# Altium PCB KMP-Watermeter-PCB.PcbDoc
Units mil, origin at the board's own origin, x right, y up, seen from the top; angles counter-clockwise.
Board outline 740 x 1530 mil, 2 copper layers (Top Layer, Bottom Layer), stack 65.8 mil thick; 17 components, 27 nets, 57 pads, 5 vias.
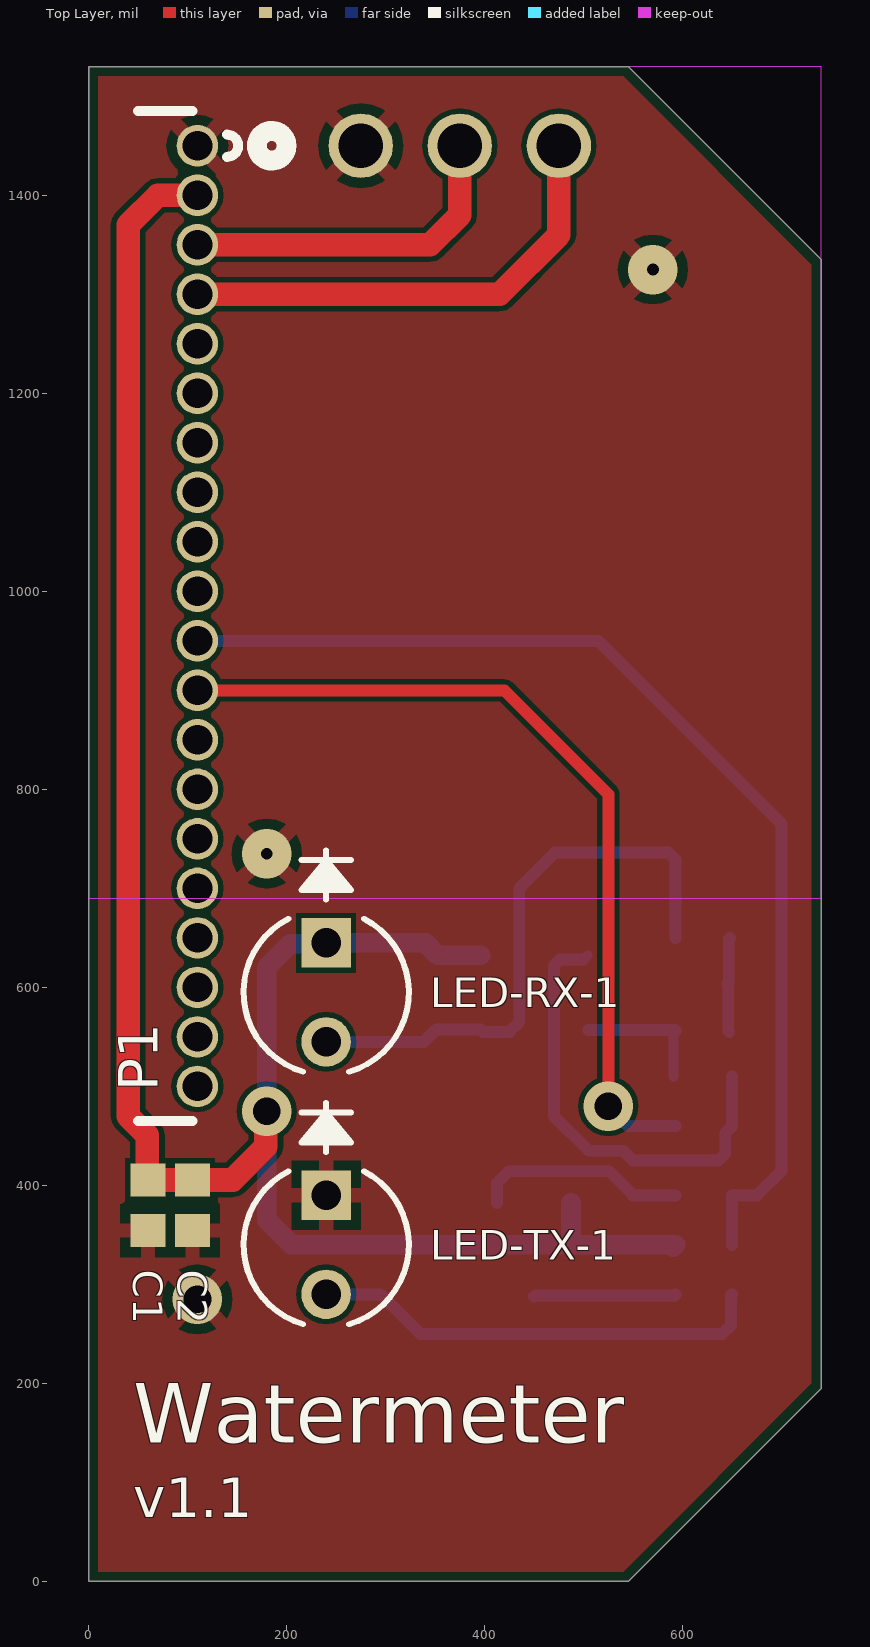
[diagram p0: Top Layer view]
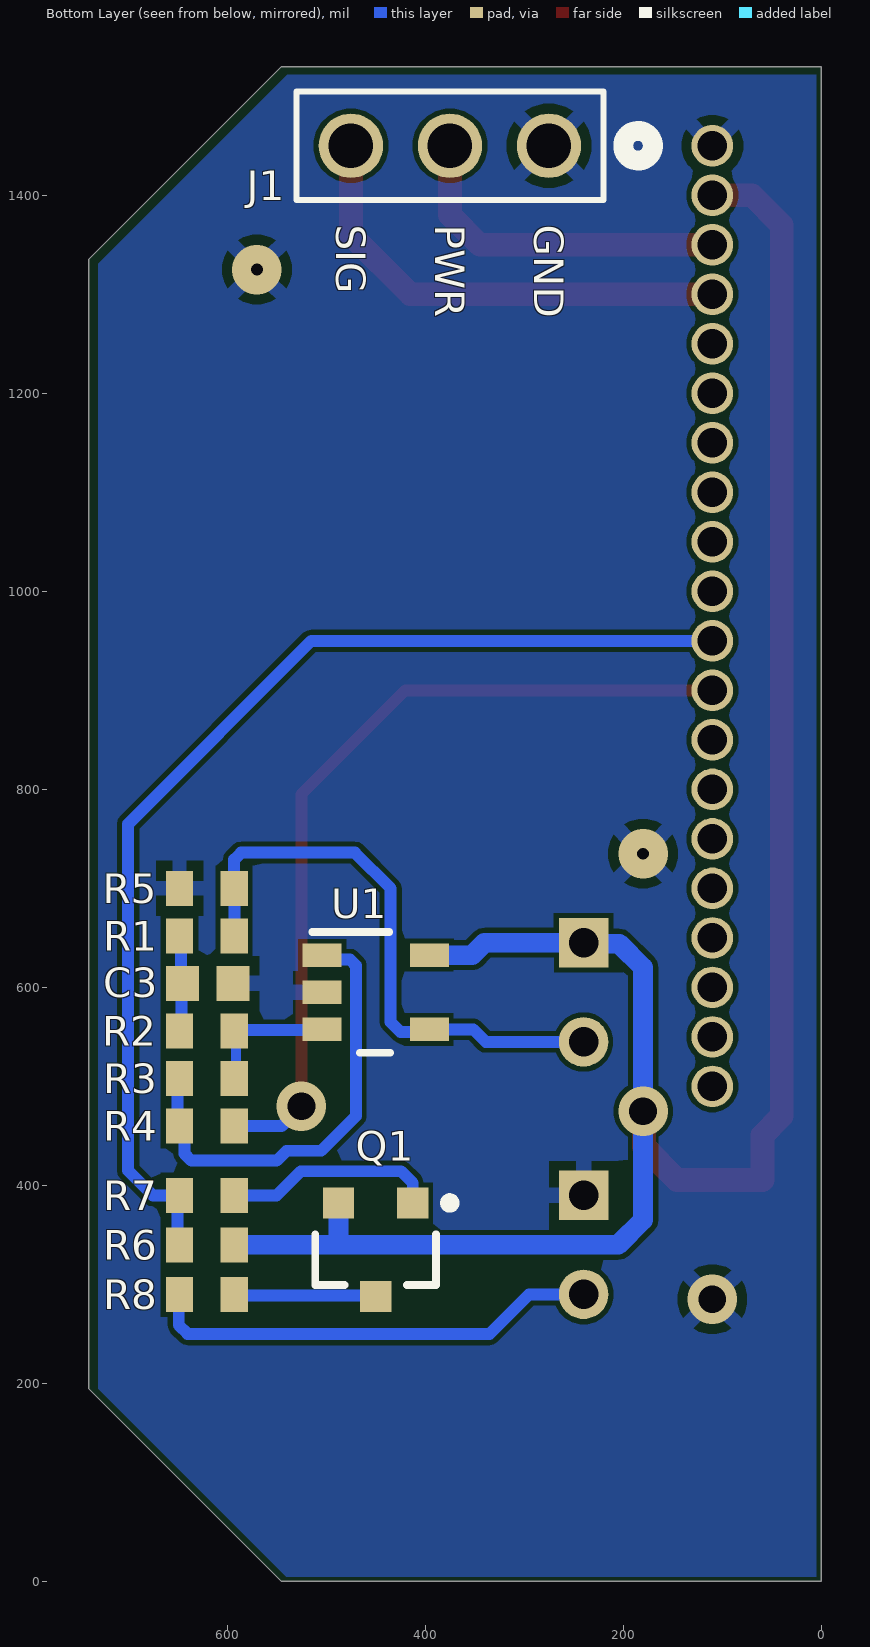
[diagram p1: Bottom Layer view, seen from below]
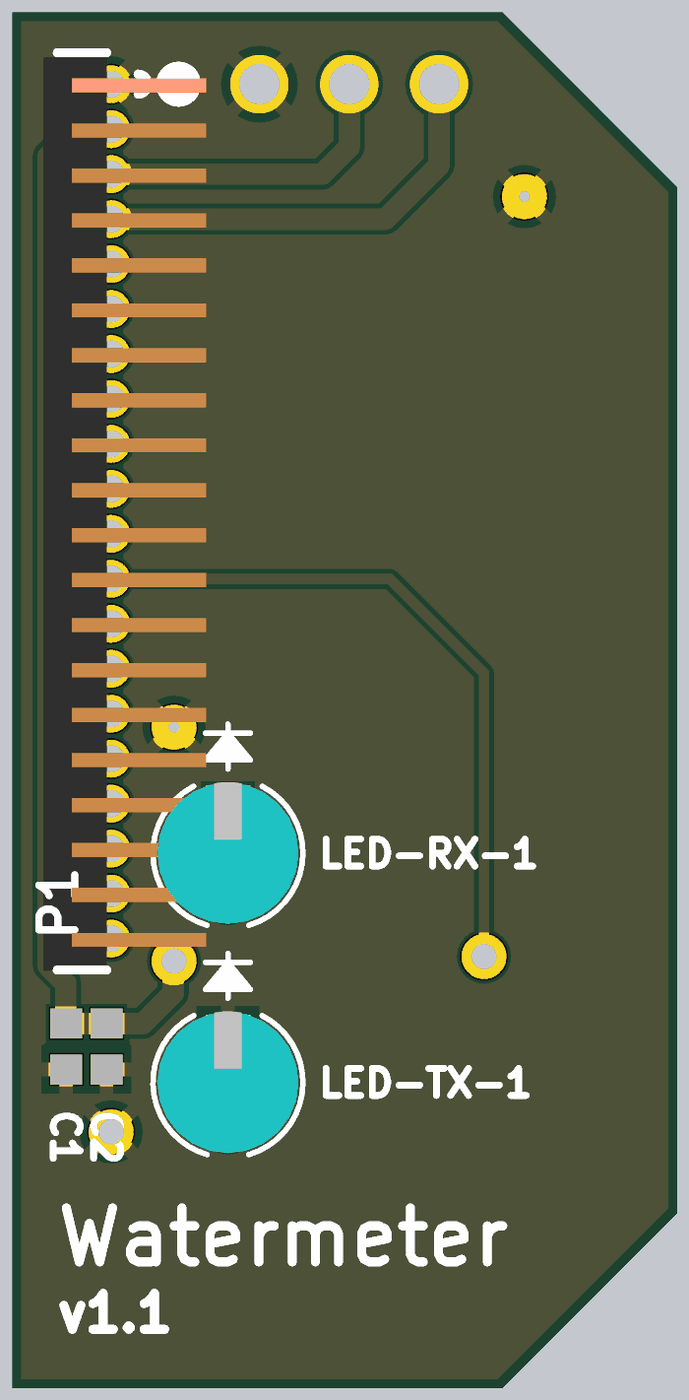
[diagram p2: 3D render of the assembled board from above, using the file's embedded part models]

## Layer stack, top to bottom
Top Solder: solder mask 0.4, Solder Resist, Dk 3.5
Top Layer: signal copper 1.4
Dielectric 1: dielectric 63, FR-4, Dk 4.8
Bottom Layer: signal copper 1.4
Bottom Solder: solder mask 0.4, Solder Resist, Dk 3.5

## Board outline
0,0 545,0 740,195 740,1335 545,1530 0,1530

## Design rules (kind name [scope] priority, off if disabled: settings)
Clearance [All] p1: gap=5 ignorepadtopadclearanceinfootprint=FALSE
ComponentClearance [All] p1: gap=5 collisioncheckmode=3 verticalgap=5 showdistances=TRUE
DiffPairsRouting [All] p1: maxlimit=10 minlimit=5 mostfreqgap=5 toplayer_minwidth=5 toplayer_maxwidth=1000 toplayer_prefwidth=5 bottomlayer_minwidth=5 bottomlayer_maxwidth=1000 bottomlayer_prefwidth=5 maxuncoupledlength=500
Height [All] p1: minheight=0 maxheight=71497.94 prefheight=500
HoleSize [All] p1: absolutevalues=TRUE maxlimit=248.03 minlimit=11.81 maxpercent=80.000 minpercent=20.000
HoleToHoleClearance ViaHoleToHoleClearance [IsVia vs IsVia] p1: gap=8 allowstackedmicrovias=FALSE
HoleToHoleClearance [All] p2: gap=10 allowstackedmicrovias=TRUE
MinimumAnnularRing [All] p1: minimumring=3
MinimumSolderMaskSliver [All] p1: minsoldermaskwidth=0
PlaneClearance [All] p1: clearance=5
PlaneConnect PlaneConnectPowerPads [InPadClass('PowerPads')] p1: planeconnectstyle=Direct reliefexpansion=20 reliefentries=4 reliefconductorwidth=10 reliefairgap=10
PlaneConnect [All] p2: planeconnectstyle=Relief reliefexpansion=20 reliefentries=4 reliefconductorwidth=10 reliefairgap=10
PolygonConnect PolygonConnectPowerPads [All vs (InPadClass('PowerPads'))] p1: connectstyle=Direct reliefconductorwidth=10 reliefentries=4 polygonreliefangle="90 Angle" airgapwidth=10
PolygonConnect [All] p2: connectstyle=Relief reliefconductorwidth=15 reliefentries=4 polygonreliefangle="45 Angle" conductorbypadedge=TRUE mindistance=15 enablemindistance=FALSE airgapwidth=10
RoomDefinition Transmitter [InComponentClass('Transmitter')] p1: confinementstyle=ConfineIn formatcopy=TRUE lockcomponents=FALSE outline -970,-900 -665,-900 -665,-660 -970,-660
RoomDefinition Receiver [InComponentClass('Receiver')] p2: confinementstyle=ConfineIn formatcopy=TRUE lockcomponents=FALSE outline 0,-55 -260,-55 -260,-280 0,-280
RoomDefinition KMP-Watermeter-Schematic [InComponentClass('KMP-Watermeter-Schematic')] p3: confinementstyle=ConfineIn formatcopy=TRUE lockcomponents=FALSE outline -325,-345 -595,-345 -595,-555 -325,-555
RoutingVias [All] p1: holewidth=11.81 width=23.62 viastyle="Through Hole" minholewidth=6 minwidth=12 maxholewidth=248.03 maxwidth=248.03
SilkToSilkClearance [All] p1: silktosilkclearance=0
SilkToSolderMaskClearance [IsPad] p1: minsilkscreentomaskgap=5.91 clearancetoexposedcopper=TRUE
SolderMaskExpansion [All] p1: expansion=2 istentingtop=FALSE
SupplyNets "Schematic Supply Nets_2" [InNet('VDD2')] p1: voltage=0.000
SupplyNets "Schematic Supply Nets_1" [InNet('+3V3')] p2: voltage=0.000
SupplyNets "Schematic Supply Nets" [InNet('GND')] p3: voltage=0.000
UnpouredPolygon BoardOutlineClearance [All] p2:
Width [All] p1: maxlimit=1000 minlimit=10 preferedwidth=12
Width Power [InNet('+3V3') or InNet('+12V')Or InNet('+3V3_ISO') Or InNet('GND') Or InNet('GND_ISO')] p2: maxlimit=1000 minlimit=20 preferedwidth=40 minimp=50.000000 maximp=50.000000 favimp=50.000000
20 further rules are at their usual default settings.

## Classes and differential pairs
component class Transmitter: LED-TX-1 Q1 R6 R7 R8
component class Receiver: C3 LED-RX-1 R1 R2 R3 R4 R5 U1
component class KMP-Watermeter-Schematic: C1 C2 J1 P1

## Components (designator, comment, footprint, x,y, rotation, side; value= is the part's Value field where it differs from the comment)
C1 "10n" CAPC1608X90X35LL15T15 60,380 r90 top
C2 "1u" CAPC1608X90X35LL15T15 105,380 r90 top
C3 "10n" CAPC1608X90X35LL15T15 619.53,604 r0 bottom locked
J1 "Pinheader" CONN03_6130_7P62X2P54_WRE 275,1450 r0 bottom
LED-RX-1 "TSAL4400" LED_RADIAL_TSAL4400 240,645 r270 top locked
LED-TX-1 "HIR204C" LED_RADIAL_HIR204C 240,390 r270 top locked
P1 "SMS-120-01-T-S" SMS-S-120 110,1450 r270 top locked
Q1 "AO3401A" AO-SOT-23-3L_V 450,335 r270 bottom
R1 "470K" RESC1608X55X25NL10T15 620.51,652 r0 bottom
R2 "470K" RESC1608X55X25NL10T15 620.51,556 r180 bottom
R3 "10M" RESC1608X55X25NL10T15 620.51,508 r0 bottom
R4 "549" RESC1608X55X25NL10T15 620.51,460 r180 bottom
R5 "4.7M" RESC1608X55X25NL10T15 620.51,700 r0 bottom
R6 "1M" RESC1608X55X25NL10T15 620.51,340 r180 bottom
R7 "549" RESC1608X55X25NL10T15 620.51,390 r180 bottom
R8 "200" RESC1608X55X25NL10T15 620.51,290 r180 bottom
U1 "TLV7031DBVR" DBV0005A_N 450,595 r180 bottom

## Footprints (in the part's own frame and the unit in brackets; to place one, negate y for a bottom-side part, rotate by r counter-clockwise, add the part's x,y. Pads: shape width x height; smd on the part's side, far side on the other; paste and mask are expansions set on the pad)
AO-SOT-23-3L_V [mm] "SOT23, 3-Leads, Body 3.1x1.8mm, Pitch 0.95mm"
  rect 0.8x0.8 smd: 1(-1.2,0.95) 2(-1.2,-0.95) 3(1.2,0)
  silkscreen extent -1.32,-1.55 0.9,2.02, body extent -1.5,-1.55 1.5,1.55, height 1.25
CAPC1608X90X35LL15T15 [mm] "Chip Capacitor, 2-Leads, Body 1.60x0.81mm, IPC High Density"
  rect 0.85x0.9 smd: 1(-0.65,0) 2(0.65,0)
  body extent -0.88,-0.48 0.87,0.48, height 0.9
CONN03_6130_7P62X2P54_WRE [mil]
  round 65 hole 45 paste-99999 mask+0: 1(0,0) 2(100,0) 3(200,0)
  silkscreen extent -105,-55 255,55
DBV0005A_N [mm]
  rect 1x0.6 smd paste+0 mask+0.051: 1(-1.375,0.95) 2(-1.375,0) 3(-1.375,-0.95) 4(1.375,-0.95) 5(1.375,0.95)
  silkscreen extent -1.63,-1.55 0.37,1.55
LED_RADIAL_HIR204C [mil]
  rect 50x50 / inner round 60 / far side rect 50x50 hole 30 paste-99999 mask+0: 1(0,0)
  round 50 / inner round 60 / far side round 50 hole 30 paste-99999 mask+0: 2(100,0)
  silkscreen extent -93,-83 130,83, body extent -29,-78 128,78, height 207
LED_RADIAL_TSAL4400 [mil]
  rect 50x50 / inner round 60 / far side rect 50x50 hole 30 paste-99999 mask+0: 1(0,0)
  round 50 / inner round 60 / far side round 50 hole 30 paste-99999 mask+0: 2(100,0)
  silkscreen extent -93,-83 130,83, body extent -29,-78 128,78, height 207
RESC1608X55X25NL10T15 [mm] "Chip Resistor, 2-Leads, Body 1.60x0.80mm, IPC Medium Density"
  rect 0.7x0.9 smd: 1(-0.7,0) 2(0.7,0)
  body extent -0.85,-0.45 0.85,0.45, height 0.55
SMS-S-120 [mil]
  round 42 / inner round 60 / far side round 42 hole 30 paste-99999: 1(0,0) 2(50,0) 3(100,0) 4(150,0) 5(200,0) 6(250,0) 7(300,0) 8(350,0) 9(400,0) 10(450,0) 11(500,0) 12(550,0) 13(600,0) 14(650,0) 15(700,0) 16(750,0) 17(800,0) 18(850,0) 19(900,0) 20(950,0)
  silkscreen extent -35,-60 985,41, body extent -30,-182 986,2, height 71

## Part data
C1 C2 C3: library part CMP-2006-02133-1, Manufacturer="AVX Interconnect / Elco", Part Number=0603ZC101KAT2A
J1: library part 61300311121, "WR-PHD 2.54 mm Pin Header", Manufacturer_Name="Wurth Electronics", Copyright="Copyright (C) 2026 Ultra Librarian. All rights reserved.", Manufacturer_Part_Number=61300311121, RefDes=RefDes, Type=Type
LED-RX-1: "Description", Manufacturer_Name="Vishay Semiconductors", Copyright="Copyright (C) 2025 Ultra Librarian. All rights reserved.", Manufacturer_Part_Number=TSAL4400, Type="LED Indication"
LED-TX-1: "Description", Manufacturer_Name=Everlight, Copyright="Copyright (C) 2025 Ultra Librarian. All rights reserved.", Manufacturer_Part_Number=HIR204C, Type="LED Indication"
P1: "No Description Available", Mfr_Name="Samtec Inc", RefDes=RefDes, Type=Type
Q1: library part CMP-2000-05778-1, "P-Channel MOSFET, 30 V, 4 A, -55 to 150 degC, 3-Pin SOT-23-3L, RoHS, Tape and Reel", Continuous Drain Current=4A, Drain-Source On-Volt=30V, Frequency (Max)=NotRequiredMHz, Gate-Source Voltage (Max)=?12V, Manufacturer="Alpha and Omega", Operating Temp Range=-55Cto150C, Operating Temperature Classification=Military, Output Power (Max)=NotRequiredW, Package Description="3-Pin Small Outline Transistor, Body 2.95 x 1.6 mm, Pitch 0.95 mm", Package Reference=SOT-23-3L, Package Type=SOT-23, Power Dissipation=1.4W, Power Gain=NotRequireddB, Channel Mode=Enhancement, Datasheet URL=http://www.aosmd.com/res/data_sheets/AO3401A.pdf, Datasheet Version="Rev. 3, 03/2011", Drain Current (Max)=4A, Drain Efficiency=NotRequired%, Drain-Source On-Res=0.044ohm, Manufacturer URL=http://www.aosmd.com/, Mounting=SurfaceMount, Mounting Technology=SurfaceMount, Noise Figure=NotRequireddB, Number of  Elements=1, Package URL=http://www.aosmd.com/res/packaging_information/SOT-23-3L.pdf, Pin Count=3, Polarity=P, Rad Hardened=No, Type=PowerMOSFET
R1 R2 R3 R4 R5 R6 R7 R8: library part CMP-2000-04082-1, Manufacturer=Yageo, Part Number=RC0603FR-07549RL
U1: "Nanopower, small size comparator with push-pull output 5-SOT-23 -40 to 125", Manufacturer_Name="Texas Instruments", Copyright="Copyright (C) 2026 Ultra Librarian. All rights reserved.", Manufacturer_Part_Number=TLV7031DBVR, RefDes=RefDes, Type=TYPE

## Via types
v1: diameter 50, hole 28, Top Layer to Bottom Layer, 3 vias
v2: diameter 50, hole 12, Top Layer to Bottom Layer, 2 vias

## Nets (pads, with @x,y where several pads share a name; then routed paths per layer and width w, separated by ;. In a path a pad name is that pad's centre, name@x,y a point inside that pad or via, vN(x,y) a via of type N, cw(c..) or ccw(c..) an arc to the next point about the centre after c; other vN are vias at no path point)
+3V3: C1.2 C2.2 LED-RX-1.1 P1.2 Q1.2 R6.2 U1.5 | length 2181.2
  Top Layer w12: v1@179.09,474.09 v1(180,475)
  Top Layer w24: P1.2 70,1400 40,1370 40,470 59.41,450.59 59.41,405.59 C1.2 C2.2 145.59,405.59 179.09,439.09 v1@179.09,474.09
  Bottom Layer w12: LED-RX-1.1@239.03,644.03 LED-RX-1.1 ; 485,340 487.4,342.4
  Bottom Layer w20: LED-RX-1.1@239.03,644.03 204.03,644.03 180,620 v1(180,475) 180,365 205,340 485,340 R6.2 R6.2@590.45,337.5 ; LED-RX-1.1 340,645 352.6,632.4 U1.5 ; 487.4,342.4 Q1.2
GND: C1.1 C2.1 C3.1 J1.1 LED-TX-1.1 P1.1 R5.2 U1.2
  other v1: 110,285
  other v2: 180,735 570,1325
NetC3_2: C3.2 R1.2 R2.1 | length 97
  Bottom Layer w12: R2.1@647.09,555 646.1,555.98 646.1,603.03 C3.2 646.58,605.47 646.58,648.54 R1.2@648.03,650
NetJ1_3: J1.3 P1.4 | length 479.9
  Top Layer w24: P1.4 415,1300 475,1360 J1.3
NetLED-RX-1_2: LED-RX-1.2 R1.1 R5.1 U1.4 | length 595.1
  Bottom Layer w12: LED-RX-1.2 338.83,545 351.42,557.6 U1.4 398.47,555 425,555 435,565 435,700 471.04,736.04 585.92,736.04 592.95,729.01 R5.1 ; R5.1@592.68,699.76 592.68,650.24 R1.1@592.91,650
NetLED-TX-1_2: LED-TX-1.2 R8.1 | length 460.7
  Bottom Layer w12: LED-TX-1.2 295,290 335,250 640,250 648.84,258.84 648.84,288.84 R8.1@650,290
NetP1_5: P1.5
NetP1_6: P1.6
NetP1_7: P1.7
NetP1_8: P1.8
NetP1_9: P1.9
NetP1_10: P1.10
NetP1_11: P1.11 R6.1 R7.1 | length 1127
  Bottom Layer w12: P1.11 515,950 700,765 700,415 675,390 650,390 R6.1@650,340
NetP1_12: P1.12 R4.2 | length 849.7
  Top Layer w12: P1.12 420,900 525,795 v1(525,480)
  Bottom Layer w12: v1(525,480) 545,460 R4.2@592.91,460
NetP1_13: P1.13
NetP1_14: P1.14
NetP1_15: P1.15
NetP1_16: P1.16
NetP1_17: P1.17
NetP1_18: P1.18
NetP1_19: P1.19
NetP1_20: P1.20
NetQ1_1: Q1.1 R7.2 | length 215.6
  Bottom Layer w12: Q1.1 412.6,402.6 424.28,414.28 525.72,414.28 550,390 R7.2
NetQ1_3: Q1.3 R8.2 | length 143.9
  Bottom Layer w12: Q1.3 451.12,288.88 591.83,288.88 R8.2
NetR2_2: R2.2 R3.1 U1.3 | length 132.4
  Bottom Layer w10: R3.1@590.94,510 R2.2@590.94,554.06
  Bottom Layer w12: U1.3@504.93,556.8 592.15,556.8 R2.2
NetR3_2: R3.2 R4.1 U1.1 | length 466
  Bottom Layer w10: U1.1@499.7,627.97 U1.1
  Bottom Layer w12: U1.1@499.7,627.97 475.86,627.97 470,622.11 470,470 505,435 540,435 550,425 636.06,425 643.09,432.03 643.09,453.09 650,460 R3.2@650,510
VDD2: J1.2 P1.3 | length 347.4
  Top Layer w24: P1.3 345,1350 375,1380 J1.2

## Polygon pours and split planes (outlines as drawn)
GND on Top Layer "Top Layer-GND" (solid, pour order 2): 10,1520 540,1520 730,1330 730,200 540,10 10,10
GND on Bottom Layer "GND_L02_P005" (solid, remove dead copper, pour order 5): 540.53,5 5,5 5,1521.67 539.27,1521.67 730.26,1330.67 730.26,194.73

## Keep-outs
Top Layer:
  rectangle: 0,690 740,1530

## Silkscreen, mask and mechanical layers (free items; w line width, h text height)
Top Overlay:
  text "Watermeter" at 45,140 h60
  text "v1.1" at 45,65 h40
Bottom Overlay:
  text "GND" at 290,1370 h30 r90
  text "PWR" at 390,1370 h30 r90
  text "SIG" at 490,1370 h30 r90
Board Shape:
  the board outline again, w10